# Altium PCB AltiumSTM32_PCB.PcbDoc
Units mm, origin at the board's own origin, x right, y up, seen from the top; angles counter-clockwise.
Board outline 40.03 x 35.76 mm, 4 copper layers (Top Layer, Int1 (GND), Int2 (PWR), Bottom Layer), stack 1.57 mm thick; 35 components, 27 nets, 170 pads, 54 vias.
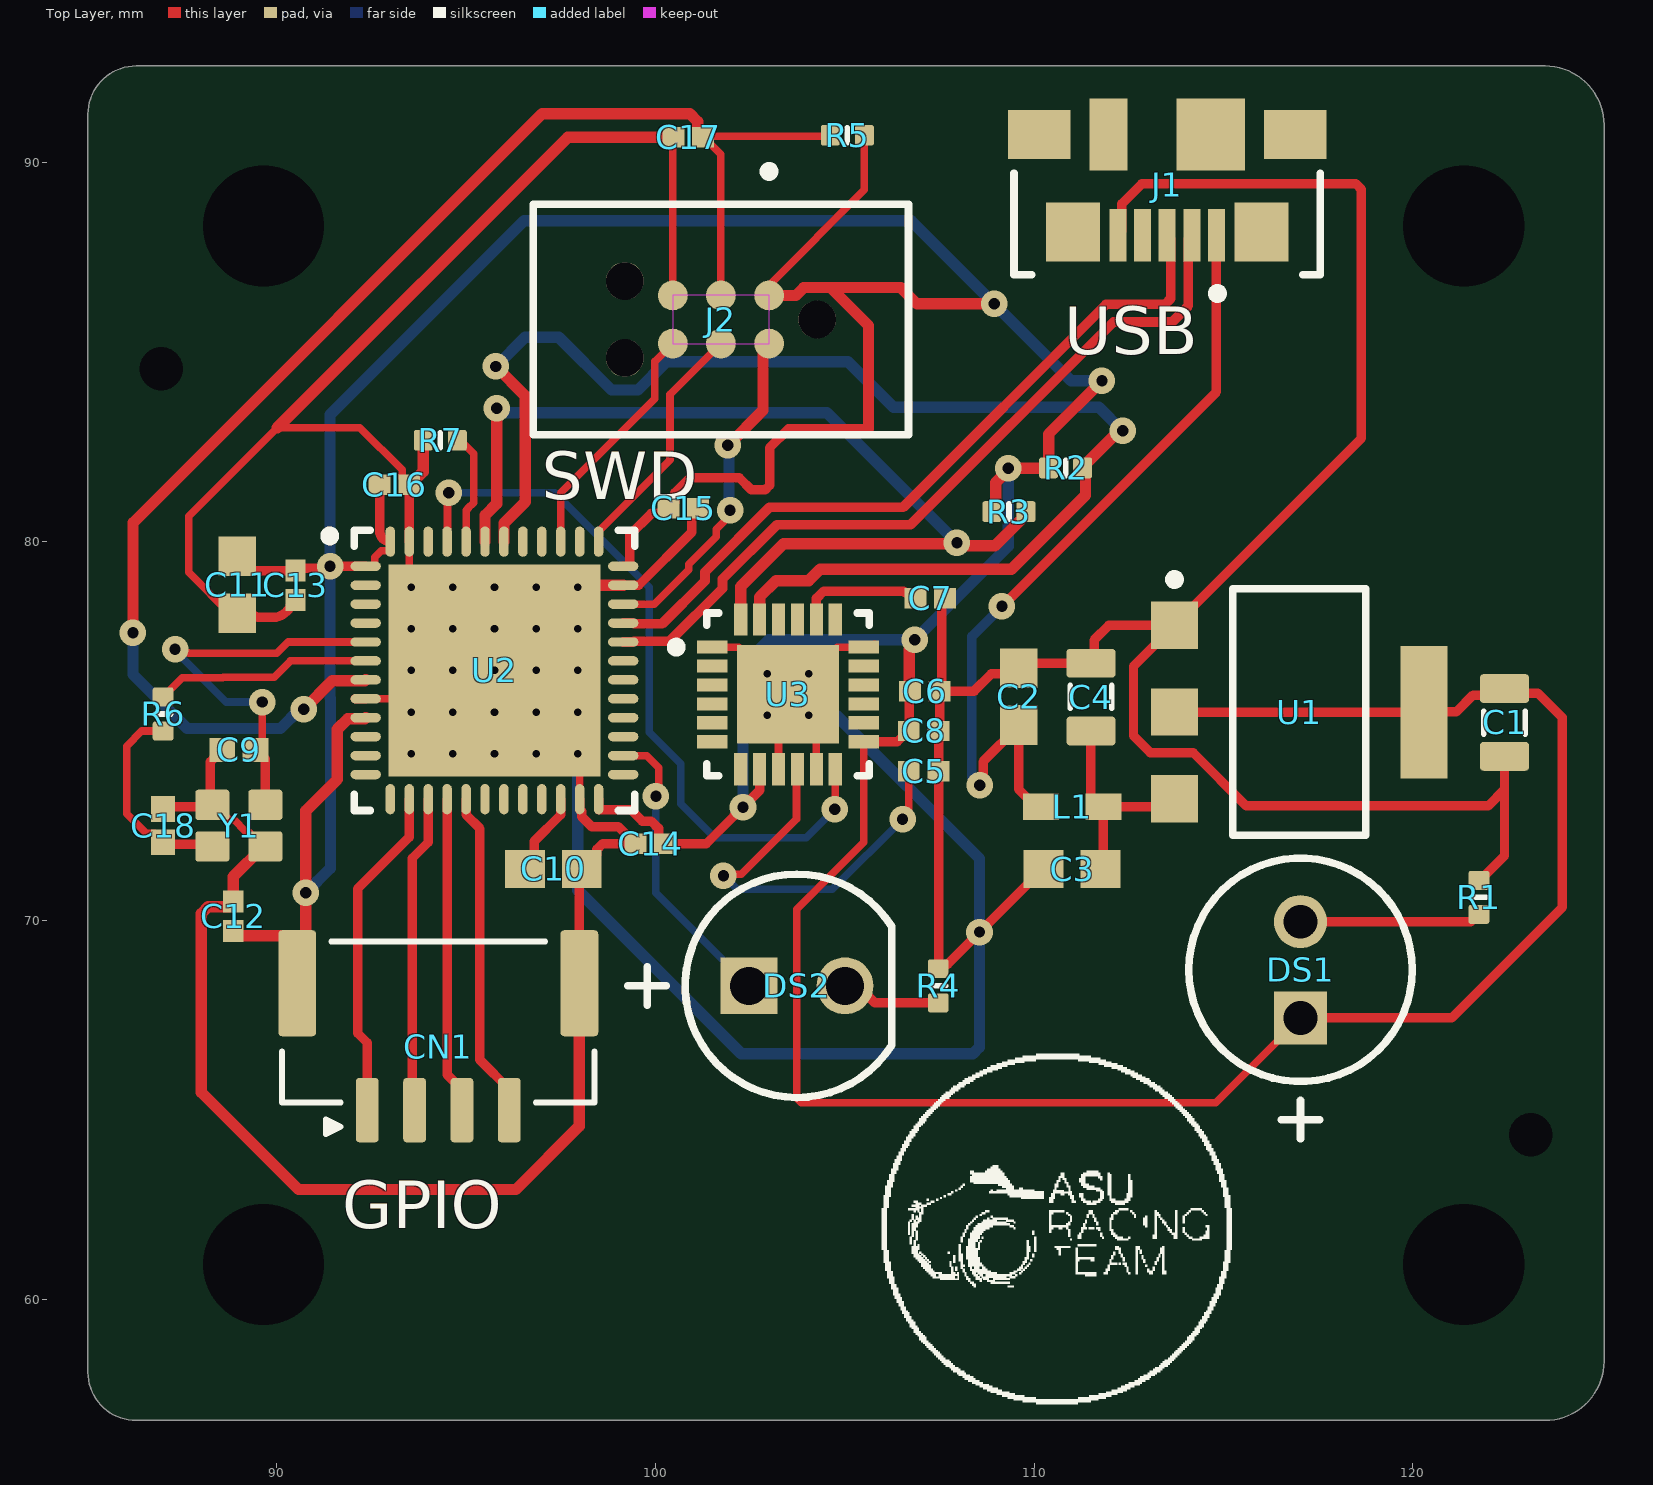
[diagram p0: Top Layer view]
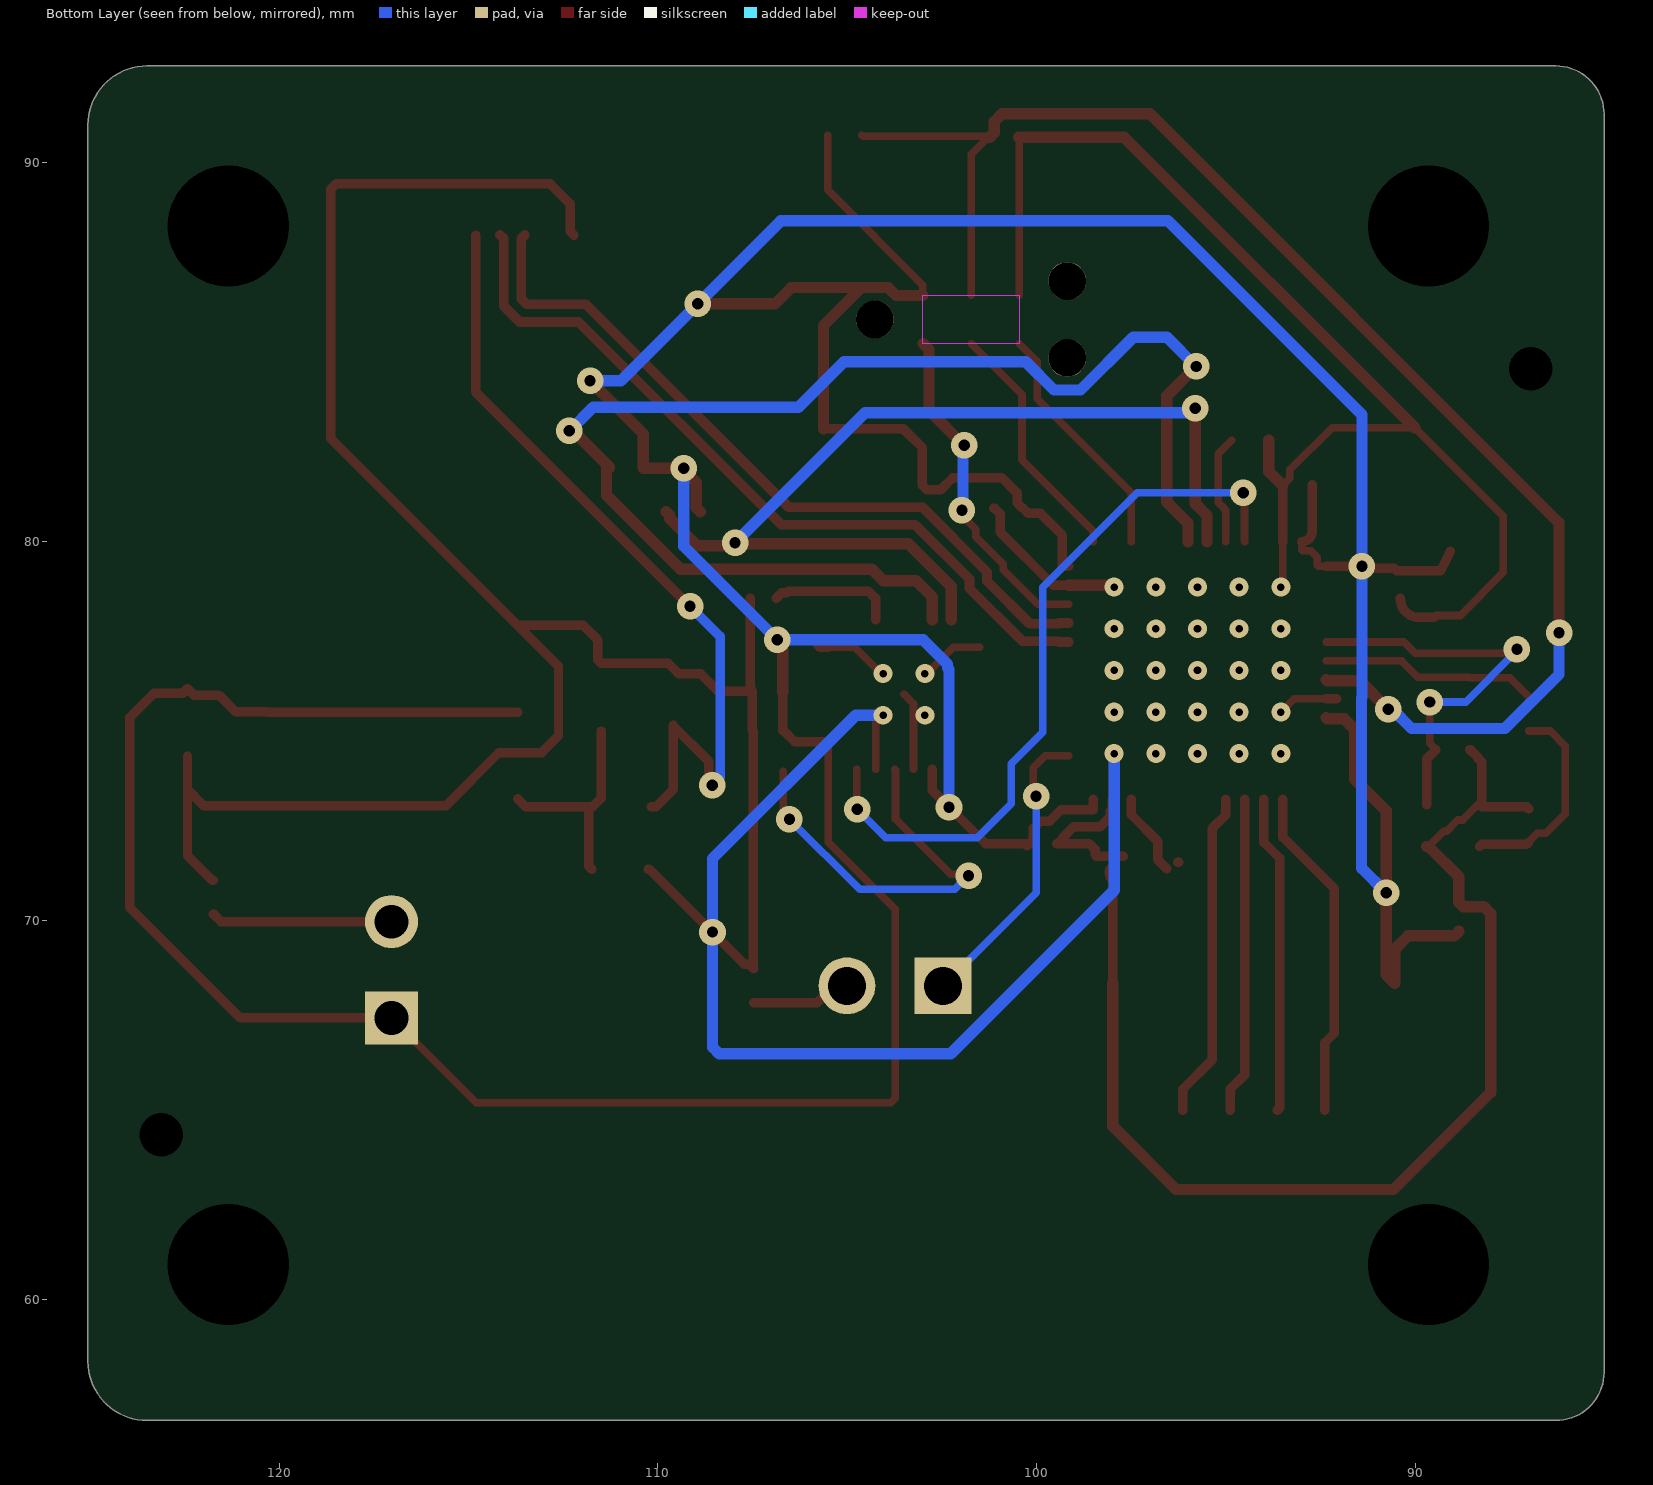
[diagram p1: Bottom Layer view, seen from below]
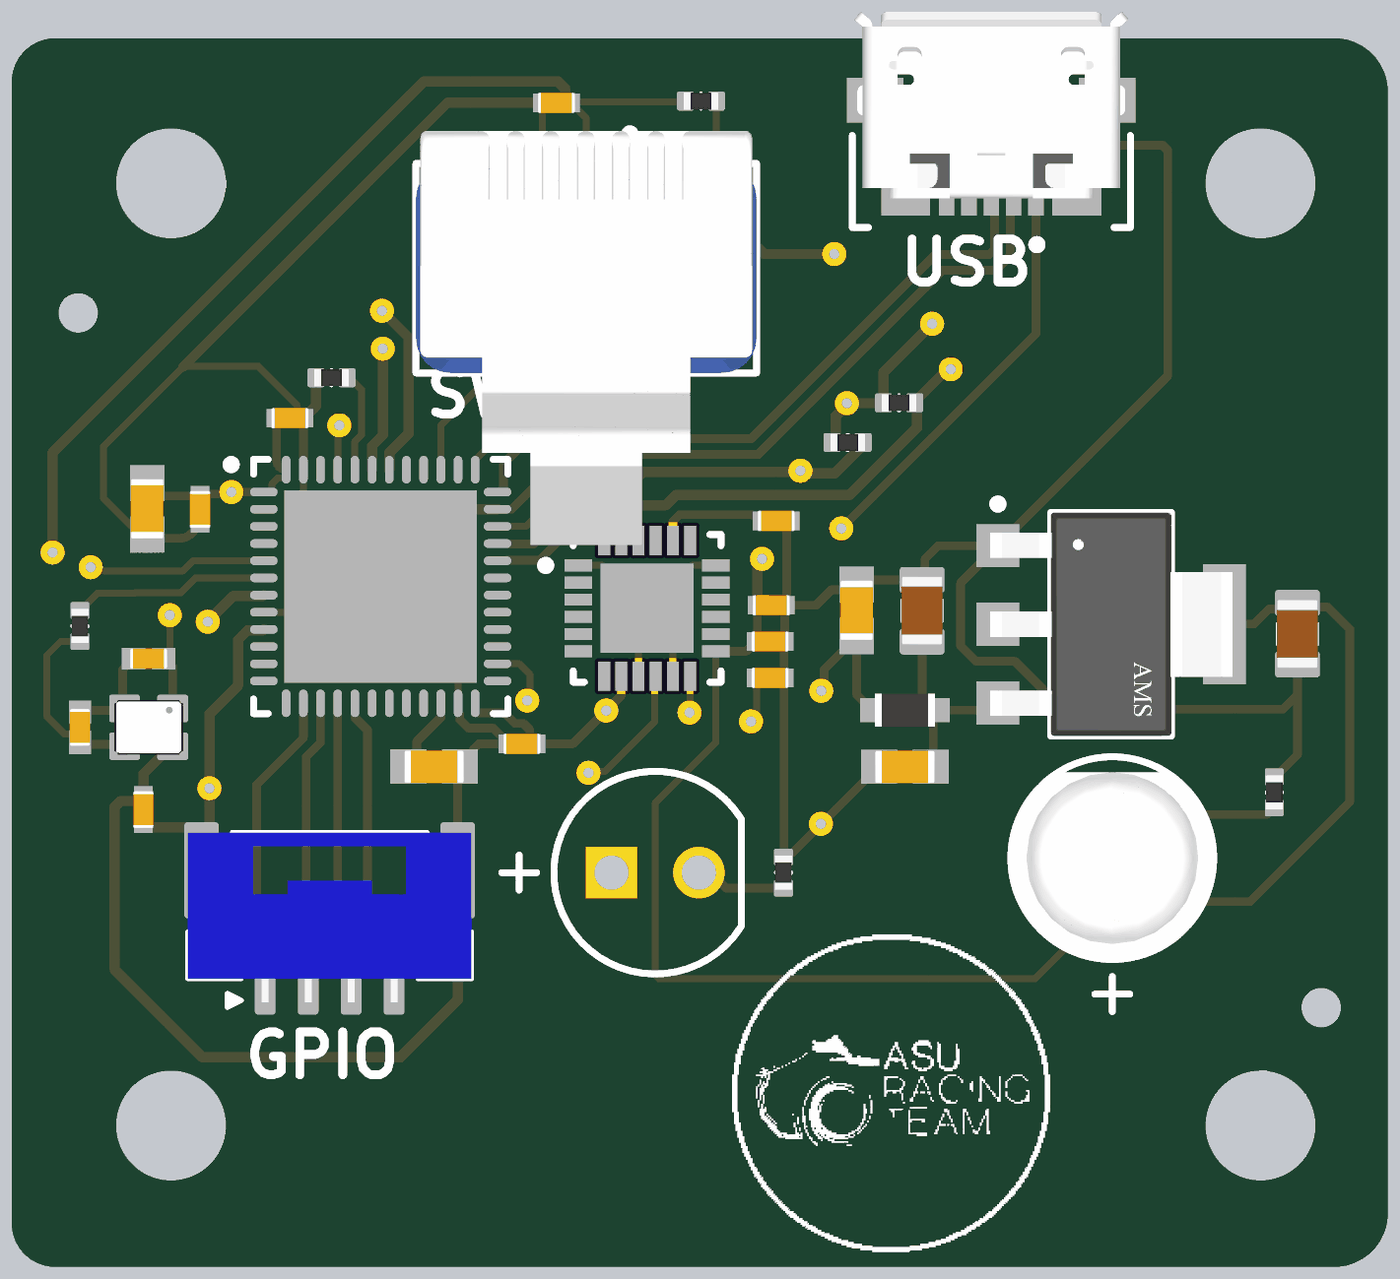
[diagram p2: 3D render of the assembled board from above, using the file's embedded part models]

## Layer stack, top to bottom
Top Solder: solder mask 0.0254, SM-001, Dk 4
Top Layer: signal copper 0.035
Dielectric 1: prepreg 0.2, PP-017, Dk 4.6
Int1 (GND): signal copper 0.0175
Dielectric 3: core 1.065, Core-039, Dk 4.6
Int2 (PWR): signal copper 0.0175
Dielectric 5: prepreg 0.2, PP-017, Dk 4.6
Bottom Layer: signal copper 0.035
Bottom Solder: solder mask 0.0254, SM-001, Dk 4

## Board outline
85.017,58.065 85.017,91.289 cw(c86.287,91.289) 86.287,92.559 123.49,92.559 cw(c123.49,91.002) 125.047,91.002 125.047,58.353 cw(c123.49,58.353) 123.49,56.795 86.287,56.795 cw(c86.287,58.065)

## Design rules (kind name [scope] priority, off if disabled: settings)
Clearance [All] p1: gap=0.2 ignorepadtopadclearanceinfootprint=FALSE
DiffPairsRouting [All] p1: maxlimit=0.254 minlimit=0.203 mostfreqgap=0.254 toplayer_maxgap=0.203 toplayer_prefgap=0.203 toplayer_minwidth=0.26 toplayer_maxwidth=0.26 toplayer_prefwidth=0.26 bottomlayer_maxgap=0.203 bottomlayer_prefgap=0.203 bottomlayer_minwidth=0.26 bottomlayer_maxwidth=0.26 bottomlayer_prefwidth=0.26 impedanceprofiledriven=TRUE impedanceprofileid={25930445-925E-4212-9ADA-EDD0736B0B84} impedanceprofilevalue=90.000000 maxuncoupledlength=12.7
PolygonConnect [All] p1: connectstyle=Direct reliefconductorwidth=0.254 reliefentries=4 polygonreliefangle="90 Angle" airgapwidth=0.254
RoutingVias [All] p1: holewidth=0.3 width=0.7 viastyle="Through Hole" minholewidth=0.25 minwidth=0.55 maxholewidth=0.4 maxwidth=0.9
SolderMaskExpansion [All] p1: expansion=0 istentingtop=FALSE
SupplyNets "Schematic Supply Nets_4" [InNet('+5V')] p1: voltage=0.000
SupplyNets "Schematic Supply Nets_3" [InNet('3V3')] p2: voltage=0.000
SupplyNets "Schematic Supply Nets_2" [InNet('VBUS')] p3: voltage=0.000
SupplyNets "Schematic Supply Nets_1" [InNet('GND')] p4: voltage=0.000
UnRoutedNet [All] p1: checkbadconnections=TRUE
Width [All] p1: maxlimit=1 minlimit=0.2 preferedwidth=0.3 midlayer1_minwidth=0.254 midlayer1_maxwidth=0.254 midlayer1_prefwidth=0.254 midlayer2_minwidth=0.254 midlayer2_maxwidth=0.254 midlayer2_prefwidth=0.254 minimp=50.000000 maximp=50.000000 favimp=50.000000
28 further rules are at their usual default settings.

## Classes and differential pairs
differential pair USB_D: +USB_D_P -USB_D_N

## Components (designator, comment, footprint, x,y, rotation, side; value= is the part's Value field where it differs from the comment)
C1 "Capacitor 22µF +/-40% 16V 0805" CAPC0805(2012)145_L 122.42,75.22 r270 top value=22u
C2 "Capacitor 1 uF +/- 10% 16 V 0603" CAPC1608X94X35NL15T15 109.594,75.908 r90 top value=2u2
C3 "Capacitor 1 uF +/- 10% 16 V 0603" CAPC1608X94X35NL15T15 111,71.352 r180 top value=2u2
C4 "Capacitor 22µF +/-40% 16V 0805" CAPC0805(2012)145_L 111.5,75.9 r90 top value=22u
C5 "Capacitor 0.1 uF +/- 5% 16 V 0402" CAPC1005X56X25LL10T15 107.079,73.941 r0 top value=100n
C6 "Capacitor 0.1 uF +/- 5% 16 V 0402" CAPC1005X56X25LL10T15 107.112,76.054 r0 top value=10n
C7 "Capacitor 0.1 uF +/- 5% 16 V 0402" CAPC1005X56X25LL10T15 107.26,78.508 r0 top value=2n2
C8 "Capacitor 0.1 uF +/- 5% 16 V 0402" CAPC1005X56X25LL10T15 107.079,75 r0 top value=100n
C9 "Capacitor 6.8 nF +/- 10% 16 V 0402" CAPC1005X56X25NL10T15 89,74.5 r0 top value=10p
C10 "Capacitor 1 uF +/- 10% 16 V 0603" CAPC1608X94X35NL15T15 97.307,71.357 r0 top value=2u2
C11 "Capacitor 1 uF +/- 10% 16 V 0603" CAPC1608X94X35NL15T15 88.958,78.862 r270 top value=2u2
C12 "Capacitor 0.1 uF +/- 5% 16 V 0402" CAPC1005X56X25LL10T15 88.85,70.107 r270 top value=100n
C13 "Capacitor 0.1 uF +/- 5% 16 V 0402" CAPC1005X56X25LL10T15 90.496,78.845 r90 top value=100n
C14 "Capacitor 0.1 uF +/- 5% 16 V 0402" CAPC1005X56X25LL10T15 99.861,72.021 r0 top value=100n
C15 "Capacitor 0.1 uF +/- 5% 16 V 0402" CAPC1005X56X25LL10T15 100.74,80.882 r180 top value=100n
C16 "Capacitor 0.1 uF +/- 5% 16 V 0402" CAPC1005X56X25LL10T15 93.11,81.5 r180 top value=100n
C17 "Capacitor 0.1 uF +/- 5% 16 V 0402" CAPC1005X56X25LL10T15 100.864,90.679 r0 top value=100n
C18 "Capacitor 6.8 nF +/- 10% 16 V 0402" CAPC1005X56X25NL10T15 87,72.5 r270 top value=10p
CN1 "BM04B-GHS-TBT" JST-BM04B-GHS-TBT_V 94.266,66.664 r0 top
DS1 "WP7113SGD" KING-WP7113SGD_V 117.033,68.694 r90 top
DS2 "UR502DC" CGX-UR502DC 103.737,68.271 r0 top
J1 "473460001" FP-473460001-MFG 113.514,90.402 r180 top
J2 "TC2030-MCP-NL" FP-TC2030-MCP-NL-MFG 101.73,85.865 r180 top
L1 "120R" MURA-BLM18-F-H1-CHIP-2_V 111,73 r0 top
R1 "Resistor 9K1  +/-5 % 0402 63 mW" RESC0402(1005)_L 121.745,70.607 r90 top value=1k
R2 "Resistor 9K1  +/-5 % 0402 63 mW" RESC0402(1005)_L 110.832,81.947 r0 top value=2k2
R3 "Resistor 9K1  +/-5 % 0402 63 mW" RESC0402(1005)_L 109.334,80.793 r0 top value=2k2
R4 "Resistor 9K1  +/-5 % 0402 63 mW" RESC0402(1005)_L 107.467,68.271 r90 top value=1k
R5 "Resistor 9K1  +/-5 % 0402 63 mW" RESC0402(1005)_L 105.068,90.729 r180 top value=10k
R6 "43D2KR2F" RESC0402(1005)_L 87,75.45 r90 top value=0R
R7 "Resistor 9K1  +/-5 % 0402 63 mW" RESC0402(1005)_L 94.32,82.676 r180 top value=10k
U1 "AMS1117-3.3" FP-AMS1117-IPC_C 117,75.5 r0 top
U2 "STM32F411CEU6" STM-UFQFPN48_L 95.75,76.6 r0 top
U3 "MPU-6050" IS-QFN-24_V 103.5,75.965 r0 top
Y1 "24MHz" EPSON-FA-128_V 89,72.5 r270 top

## Footprints (in the part's own frame and the unit in brackets; to place one, negate y for a bottom-side part, rotate by r counter-clockwise, add the part's x,y. Pads: shape width x height; smd on the part's side, far side on the other; paste and mask are expansions set on the pad)
CAPC0805(2012)145_L [mm] "Chip Capacitor, Body 2.0x1.2mm, Height 1.45mm, IPC High Density"
  rrect25% 0.76x1.3 smd: 1(-0.9,0) 2(0.89,0)
  silkscreen extent -0.3,-0.55 0.3,0.55, body extent -1,-0.6 1,0.6, height 1.45
CAPC1005X56X25LL10T15 [mm] "Chip Capacitor, 2-Leads, Body 1.10x0.60mm, IPC High Density"
  rect 0.58x0.54 smd: 1(-0.39,0) 2(0.39,0)
  body extent -0.55,-0.3 0.55,0.3, height 0.56
CAPC1005X56X25NL10T15 [mm] "Chip Capacitor, 2-Leads, Body 1.10x0.60mm, IPC Medium Density"
  rect 0.68x0.64 smd: 1(-0.44,0) 2(0.44,0)
  body extent -0.55,-0.3 0.55,0.3, height 0.56
CAPC1608X94X35NL15T15 [mm] "Chip Capacitor, 2-Leads, Body 1.75x0.96mm, IPC Medium Density"
  rect 1.05x1 smd: 1(-0.75,0) 2(0.75,0)
  body extent -0.87,-0.48 0.87,0.48, height 0.94
CGX-UR502DC [mm] "THD, 2-Leads, Dia 5.9mm, Pin Spacing 2.54mm"
  rect 1.5x1.5 hole 1: 1(-1.27,0)
  round 1.5 hole 1: 2(1.27,0)
  silkscreen extent -4.47,-2.95 2.5,2.95, body extent -2.95,-2.95 2.5,2.95, height 9.1
EPSON-FA-128_V [mm] "SMD, 4-Leads, Body 2x1.6mm, Pitch 1.45mm"
  rrect20% 0.8x0.9 smd: 1(-0.55,0.7) 2(-0.55,-0.7) 3(0.55,-0.7) 4(0.55,0.7)
  body extent -0.8,-1 0.8,1, height 0.4
FP-473460001-MFG [mm]
  rect 0.45x1.38 smd paste+0 mask+0: 1(-1.3,2.31) 2(-0.65,2.31) 3(0,2.31) 4(0.65,2.31) 5(1.3,2.31)
  rect 1.425x1.55 smd paste+0 mask+0: 6(-2.488,2.225) 7(2.488,2.225)
  rect 1.65x1.3 smd paste+0 mask+0: 8(-3.375,-0.35) 11(3.375,-0.35)
  rect 1.8x1.9 smd paste+0 mask+0: 9(-1.15,-0.35)
  rect 1x1.9 smd paste+0 mask+0: 10(1.55,-0.35)
  silkscreen extent -4.05,0.67 4.05,3.97, body extent -4.3,-2.48 4.3,3.45, height 0.25
FP-AMS1117-IPC_C [mm]
  rect 1.25x1.25 smd paste+0 mask+0: 1(-3.295,2.29) 2(-3.295,0) 3(-3.295,-2.29)
  rect 1.25x3.5 smd paste+0 mask+0: 4(3.295,0)
  silkscreen extent -3.42,-3.25 1.75,3.62, body extent -3.9,-3.35 3.9,3.35, height 0.25
FP-TC2030-MCP-NL-MFG [mil]
  round 30.98 smd paste-39370.1 mask+0: 1(-50,-25) 2(-50,25) 3(0,-25) 4(0,25) 5(50,-25) 6(50,25)
  round 39.02 hole 39.02 unplated paste-99999 mask+0: ""(-100,0) ""(100,-40) ""(100,40)
  Keep-Out Layer region: -50.01,-25 49.99,-25 49.99,25 -50.01,25
  silkscreen extent -195,-159 195,120, body extent -199,-124 199,124, height 10
IS-QFN-24_V [mm] "QFN, 24-Leads, Body 4x4mm, Pitch 0.5mm, Thermal Pad 2.7x2.6mm"
  rect 0.8x0.35 smd: 1(-2,1.25) 2(-2,0.75) 3(-2,0.25) 4(-2,-0.25) 5(-2,-0.75) 6(-2,-1.25) 13(2,-1.25) 14(2,-0.75) 15(2,-0.25) 16(2,0.25) 17(2,0.75) 18(2,1.25)
  rect 0.35x0.85 smd mask+0.102: 7(-1.25,-1.975) 8(-0.75,-1.975) 9(-0.25,-1.975) 10(0.25,-1.975) 11(0.75,-1.975) 12(1.25,-1.975) 19(1.25,1.975) 20(0.75,1.975) 21(0.25,1.975) 22(-0.25,1.975) 23(-0.75,1.975) 24(-1.25,1.975)
  rect 2.7x2.6 smd: 25(0,0)
  silkscreen extent -3.07,-2.15 2.15,2.15, body extent -2,-2 2,2, height 0.95
JST-BM04B-GHS-TBT_V [mm] "Connector, 4-Leads, Body 8.25x4.25mm, Pitch 1.25mm"
  rrect30% 0.6x1.7 smd: 1(-1.875,-1.675) 2(-0.625,-1.675) 3(0.625,-1.675) 4(1.875,-1.675)
  rrect20% 1x2.8 smd: MP1(-3.725,1.675) MP2(3.725,1.675)
  silkscreen extent -4.13,-2.31 4.13,2.78, body extent -4.13,-2.18 4.12,2.77, height 4.21
KING-WP7113SGD_V [mm] "THD, 2-Leads, Dia 5.9mm, Body Length 8.6mm"
  rect 1.4x1.4 hole 0.889: 1(-1.27,0)
  round 1.4 hole 0.889: 2(1.27,0)
  silkscreen extent -4.47,-2.95 2.95,2.95, body extent -2.95,-2.95 2.5,2.95, height 15.5
MURA-BLM18-F-H1-CHIP-2_V [mm] "Chip Ferrite Bead, 2-Leads, Body 1.6x0.8mm, Height 0.95mm, Flow"
  rect 0.95x0.7 smd: 1(-0.825,0) 2(0.825,0)
  body extent -0.87,-0.48 0.87,0.48, height 0.95
RESC0402(1005)_L [mm] "Chip Resistor, Body 1.0x0.5mm, IPC High Density"
  rrect25% 0.5x0.55 smd: 1(-0.45,0) 2(0.45,0)
  silkscreen extent 0,-0.2 0,0.2, body extent -0.5,-0.25 0.5,0.25, height 0.3
STM-UFQFPN48_L [mm] "QFN, 48-Leads, Body 7.1x7.1mm, Pitch 0.5mm, Thermal Pad 5.6x5.6mm, IPC High Density"
  oval 0.8x0.25 smd: 1(-3.4,2.75) 2(-3.4,2.25) 3(-3.4,1.75) 4(-3.4,1.25) 5(-3.4,0.75) 6(-3.4,0.25) 7(-3.4,-0.25) 8(-3.4,-0.75) 9(-3.4,-1.25) 10(-3.4,-1.75) 11(-3.4,-2.25) 12(-3.4,-2.75) 25(3.4,-2.75) 26(3.4,-2.25) 27(3.4,-1.75) 28(3.4,-1.25) 29(3.4,-0.75) 30(3.4,-0.25) 31(3.4,0.25) 32(3.4,0.75) 33(3.4,1.25) 34(3.4,1.75) 35(3.4,2.25) 36(3.4,2.75)
  oval 0.25x0.8 smd: 13(-2.75,-3.4) 14(-2.25,-3.4) 15(-1.75,-3.4) 16(-1.25,-3.4) 17(-0.75,-3.4) 18(-0.25,-3.4) 19(0.25,-3.4) 20(0.75,-3.4) 21(1.25,-3.4) 22(1.75,-3.4) 23(2.25,-3.4) 24(2.75,-3.4) 37(2.75,3.4) 38(2.25,3.4) 39(1.75,3.4) 40(1.25,3.4) 41(0.75,3.4) 42(0.25,3.4) 43(-0.25,3.4) 44(-0.75,3.4) 45(-1.25,3.4) 46(-1.75,3.4) 47(-2.25,3.4) 48(-2.75,3.4)
  rect 5.6x5.6 smd: 49(0,0)
  silkscreen extent -4.47,-3.7 3.7,3.7, body extent -3.55,-3.55 3.55,3.55, height 0.6

## Part data
C1 C4: library part CMP-001-00081-4, "Chip Capacitor, 22µF +/-40%, 16V, 0805, Thickness 1.45 mm", Case/Package=0805, Max Operating Temperature=85°C, Min Operating Temperature=-55°C, Tolerance=5%, Voltage Rating=16V, Mounting Technology=SMT, Pins=2
C2 C3 C10 C11: library part CMP-001-00003-6, "Chip Capacitor, 1 uF, +/- 10%, 16 V, 0603 (1608 Metric)", Capacitor Type=Ceramic, Case/Package=0603, Max Operating Temperature=125°C, Min Operating Temperature=-55°C, Tolerance=10%, Voltage Rating=16V, Mounting Technology=SM, Pins=2, RoHS Compliant=True
C5 C6 C7 C8 C12 C13 C14 C15 C16 C17: library part CMP-001-00001-6, "Chip Capacitor, 0.1 uF, +/- 5%, 16 V, 0402 (1005 Metric)", Capacitor Type=Ceramic, Case/Package=0402, Max Operating Temperature=125°C, Min Operating Temperature=-55°C, Tolerance=5%, Voltage Rating=16V, Mounting Technology=SM, Pins=2, RoHS Compliant=True
C9 C18: library part CMP-001-00000-6, "Chip Capacitor, 6.8 nF, +/- 10%, 16 V, 0402 (1005 Metric)", Capacitor Type=Ceramic, Case/Package=0402, Max Operating Temperature=125°C, Min Operating Temperature=-55°C, Tolerance=10%, Voltage Rating=16V, Mounting Technology=SM, Pins=2, RoHS Compliant=True
CN1: library part CMP-002-00053-3, "Header, Pitch 1.25 mm, 1 x 4 Position, Height 4.05 mm, -25 to 85 degC", Pins=6
DS1: library part CMP-007-00010-2, "LED Green, 62.5 mW, 25 mA, -40 to 85 degC, 2-Pin THD, RoHS, Bulk", Case/Package=Radial, Colour=Green, Forward Voltage=2.2V, Manufacturer=Kingbright, Package Description="2-Pin Through Hole Device, Dia 5.9 mm, Body Length 8.6 mm", Package Quantity=1000, Power=62.5mW, Datasheet URL=http://www.kingbrightusa.com/images/catalog/SPEC/WP7113SGD.pdf, Datasheet Version="Rev. 6B, 01/2015", Illumination Colour=Green, Lens Style=Dome, Luminous Intensity=40mcd, Mounting Technology=TH, Nominal Vf=2.2V, Package Reference=WP7113SGD, Packaging=Bulk, RoHS Compliant=True, Viewing Angle=30degrees
DS2: library part CMP-007-00009-2, "Red LED, 80 mW, 30 mA, -25 to 85 degC, 2-Pin THD", Manufacturer="Shenzhen CGX", Package Description="2-Pin Through Hole Device, Dia 5.9 mm, Height 9.1 mm", Power=80mW, Case/Package=UR502DC, Datasheet URL=http://datasheet.octopart.com/UR502DC-Chengguangxing-datasheet-62330342.pdf, Datasheet Version=Sep-14, Manufacturer URL=http://szcgx.com/, Mounting Technology=TH, Package Reference=UR502DC, RoHS Compliant=Unknown
J1: library part CMP-2000-05246-2, "CONN RCPT USB2.0 MICRO B SMD R/A", Current Rating=1.8A, Manufacturer=Molex, Package=0, Temperature="-30°C to +85°C", Temperature Range High=+85°C, Temperature Range Low=-30°C, Voltage Rating=30V, Automotive=No, Category=Conn, ComponentLink2Description=Datasheet, ComponentLink2URL=https://www.molex.com/webdocs/datasheets/pdf/en-us/0473460001_IO_CONNECTORS.pdf, Conn Orientation="Right Angle", Contact Material=Gold,Nickel, Device Class L1=Connectors, Device Class L2="USB Connectors", Device Class L3=unset, Digikey Description="CONN RCPT USB2.0 MICRO B SMD R/A", Footprint Url=https://www.molex.com/pdm_docs/sd/473460001_sd.pdf, Height=2.945mm, Is Female=yes, Lead Free=Yes, Manufacturer Part Number=473460001, Number Of Contacts=5, Octopart=https://octopart.com/47346-0001-molex-7164928, Pitch=0.65mm, RoHS=TRUE, Shielding=true, Usb Standard="USB 2.0"
J2: library part CMP-205963-000002-1, "CABLE TAG-CONNECT IN-CIRCUIT", Package Quantity=1, Lead Free="Lead Free", Reach SVHC Compliant=Yes, RoHS Compliant=Yes, Series=-
L1: library part CMP-006-00004-3, "Chip Ferrite Bead for General Use, 120 Ohm, 500 mA, -55 to 125 degC, 0603 (1608 Metric), RoHS, Tape and Reel", Case/Package=0603, Current Rating=500mA, Manufacturer=Murata, Max Operating Temperature=125°C, Min Operating Temperature=-55°C, Package Quantity=4000, Package Reference=BLM18_H950-2, Resistance=200mohm, Tolerance=25%, Core Material=Ferrite, Datasheet URL=https://statics3.seeedstudio.com/images/opl/datasheet/303010016.pdf, Datasheet Version=Jun-12, Impedance=120Ohm, Max Current Rating=500mA, Packaging=TapeandReel, RoHS Compliant=True
R1 R2 R3 R4 R5 R7: library part CMP-009-00135-3, "Chip Resistor, 9,1 kOhms, +/-5 %, 63 mW, -55 to 155 degC, 0402", Case/Package=0402, Max Operating Temperature=155°C, Min Operating Temperature=-55°C, Power=63mW, Tolerance=5%, Pins=2
R6: library part CMP-009-00100-2, "43K2 0.063W 1% 0402 (1005 Metric)  SMD", Case/Package=0402, Power=63mW, Tolerance=1%, Mounting Technology=SMT, Pins=2
U1: library part CMP-209535-000001-1, "LDO Voltage Regulators 1A, 3.3V", Dropout Voltage=1.1V, Manufacturer="Advanced Monolithic Systems", Max Junction Temp=+125°C, Max Power Dissipation=1.2W, Max Supply Voltage=15V, Nominal Supply Current=5mA, Output Current=1A, Output Voltage=3.3V, Package=AMS1117, Temperature="-40°C to +125°C", Temperature Range Low=-40°C, Automotive=No, Category=IC, ComponentLink2Description=Datasheet, ComponentLink2URL=http://www.advanced-monolithic.com/pdf/ds1117.pdf, Device Class L1="Integrated Circuits (ICs)", Device Class L2="Power Management ICs", Device Class L3="Voltage Regulators - Linear", Height=1.8mm, Ipc Land Pattern Name=SOT229P700X180-4, Lead Free=Yes, Manufacturer Part Number=AMS1117-3.3, Number Of Outputs=1, Octopart=https://octopart.com/ams1117-3.3-advanced+monolithic+systems-25899300, Output Type=Fixed, RoHS=TRUE, Standoff Height=0.64mm, Temperature Range High=+125°C
U2: library part CMP-0243-00165-1, "ARM Cortex-M4 32-bit MCU+FPU, 512 KB Flash, 128 KB RAM, 36 I/Os, 48-Pin UFQFPN, -40 to 85 degC, Tray", I/Os (High Current)=36, Operating Frequency(F) (Processor speed) (MHz)=100, Package Description=UFQFPN48, Package Reference="48-Pin Ultra Thin Fine Pitch Quad Flat No-Lead, 7 x 7 x 0.6 mm Body, 0.5 mm Pitch, Exposed Pad", Supply Voltage(Vcc) min (V)=1.7, ComponentLink1Description="Manufacturer URL", ComponentLink1URL=http://www.st.com/, ComponentLink2Description=Datasheet, ComponentLink2URL=http://www.st.com/st-web-ui/static/active/en/resource/technical/document/datasheet/DM00115249.pdf, Core="ARM Cortex-M4", DatasheetVersion="Rev. 6", FLASH Size (Prog) (kB)=512, Internal RAM Size (kB)=128, Mounting Technology="Surface Mount", Packing=Tray
U3: library part CMP-1753-00002-2, "3-Axis Gyroscope, Accelerometer and a Digital Motion Processor(TM) (DMP), 2.375 to 3.46 V, -40 to 85 degC, 24-Pin QFN, RoHS, Tape and Reel", Manufacturer=InvenSense, Standard Package=5,000, Category=Sensors,Transducers, Datasheet URL=http://datasheet.octopart.com/MPU-6050-InvenSense-datasheet-14421344.pdf, Datasheet Version="Rev. 3.3, 05/2012", Dynamic Catalog=MPU-6000™Series, Family=Multifunction, Featured Product=MPU-60506-Axis,IntegratedI²CSolution, Manufacturer URL=http://www.invensense.com/, Online Catalog=MPU-6000™Series, Other Names="1428-1007-2 / MPU6050", Output Type=Digital, Sensor Type=MotionTracking, Unit PriceUSD=Digital
Y1: library part CMP-003-00028-1, "Crystal, 24 MHz, +/- 10 ppm, -20 to 75 degC, 4-Pin SMD, RoHS, Tape and Reel", Case/Package=SMD/SMT, Load Capacitance=12pF, Max Operating Temperature=75°C, Min Operating Temperature=-20°C, ESR=80, Frequency=24MHz, Mounting Technology=SMT, Pins=4, RoHS Compliant=Yes

## Free pads (board coordinates)
  round 1.524 hole 3.2 unplated: 4(89.651,88.336) 5(89.651,60.909) 6(121.344,60.909) 8(121.344,88.336)
  oval 0x1.524 hole 1.15 unplated: TH(86.95,84.564) TH(123.112,64.341)

## Via types
v1: diameter 0.5, hole 0.2, Top Layer to Bottom Layer, 29 vias
v2: diameter 0.7, hole 0.3, Top Layer to Bottom Layer, 25 vias

## Nets (pads, with @x,y where several pads share a name; then routed paths per layer and width w, separated by ;. In a path a pad name is that pad's centre, name@x,y a point inside that pad or via, vN(x,y) a via of type N, cw(c..) or ccw(c..) an arc to the next point about the centre after c; other vN are vias at no path point)
3V3: C1.1 C6.1 C8.1 C11.1 C12.2 C13.2 C14.2 C15.2 C16.2 CN1.MP1 DS1.1 J2.1 R2.1 R3.1 R5.1 U1.2 U1.4 U2.1 U2.9 U2.24 U2.36 U2.48 U3.8 U3.13 | length 157.3
  Top Layer w0.2: U2.1 92.565,79.35 92.588,79.373 92.588,79.588 92.762,79.762 92.977,79.762 93,79.785 U2.48 ; J2.1 103,86.771 105.518,89.289 R5.1 ; U3.13 105.5,72.059 103.737,70.296 103.737,65.299 103.854,65.182 114.791,65.182 DS1.1
  Top Layer w0.25: C11.1@89.078,79.746 89.107,79.686 89.333,79.235 C13.2 90.554,79.292 91.35,79.292 v2(91.407,79.35) U2.1 ; C16.2 92.72,80.28 ccw(c93,80.28) U2.48 ; U2.24 98.5,72.925 99.347,72.925 99.656,72.616 99.895,72.616 100.085,72.426 100.085,72.132 C14.2@100.251,71.967 ; U2.36 99.318,79.35 99.318,80.168 99.896,80.746 100.214,80.746 C15.2 100.37,80.882 100.515,81.027 100.515,81.286 100.915,81.686 102.213,81.686 102.534,81.364 102.894,81.364 103.019,81.489 103.019,82.481 103.513,82.975 105.627,82.975 ; C14.2 101.341,72.021 102.75,73.43 U3.8 ; U3.13 106.384,74.715 106.669,75 C8.1 106.705,75.016 C6.1@106.705,76.038 ; U1.2 U1.4 120.302,75.507 121.149,75.507 121.588,75.947 122.247,75.947 C1.1 122.538,76.002 123.298,76.002 123.945,75.356 123.945,70.341 121.028,67.424 DS1.1
  Top Layer w0.3: C12.2 88.85,69.709 88.97,69.589 90.191,69.589 90.541,69.239 CN1.MP1 90.767,68.566 v2(90.767,70.728) 90.767,72.89 91.6,73.723 91.6,75.047 91.878,75.325 92.05,75.325 92.325,75.325 U2.9 ; J2.1 103.709,86.5 103.92,86.71 104.62,86.71 ; 105.627,82.975 105.627,85.704 104.62,86.71 ; C6.1@106.705,76.038 106.705,77.158 106.844,77.296 v2(106.844,77.405) ; R3.1 108.984,80.893 108.984,81.56 109.314,81.89 v2(109.314,81.936) R2.1@110.37,81.936 ; v2(108.946,86.278) 106.907,86.278 106.475,86.71 104.62,86.71 ; R2.1 110.382,82.839 v2(111.791,84.248)
  Bottom Layer w0.3: v2(90.767,70.728) 91.418,71.379 91.418,75.865 91.407,75.876 v2(91.407,79.35) 91.407,83.348 96.533,88.474 106.75,88.474 v2(108.946,86.278) 110.976,84.248 v2(111.791,84.248) ; v2(102.312,72.989) 102.312,76.627 102.35,76.665 102.35,76.763 102.991,77.405 v2(106.844,77.405) 109.314,79.874 v2(109.314,81.936)
+5V: C3.1 C4.1 L1.2 U1.3 | length 5.8
  Top Layer w0.25: C4.1 111.5,73.225 111.725,73 L1.2 ; C3.1 111.825,71.427 L1.2 ; U1.3 113.495,73 L1.2
GND: C1.2 C2.2 C3.2 C4.2 C5.2 C6.2 C7.2 C8.2 C9.1 C10.2 C11.2 C12.1 C13.1 C14.1 C15.1 C16.1 C17.1 C18.1 CN1.MP2 J1.5 J2.5 R1.2 R4.2 R7.2 U1.1 U2.8 U2.23 U2.35 U2.47 U2.49 U3.1 U3.9 U3.11 U3.18 U3.25 Y1.2 Y1.4 | length 170.6
  Top Layer w0.2: Y1.2 88.35,73.05 88.75,72.65 88.873,72.65 89.173,72.35 89.25,72.35 Y1.4@89.65,71.95 ; 89.5,78 89.452,78.048 88.817,78.048 87.679,79.186 87.679,80.671 90.016,83.007 92.197,83.007 93.31,81.894 93.31,81.67 93.48,81.5 C16.1 ; U2.8 93.2,75.85 v1(93.55,75.5) ; U2.47 93.5,78.85 v1(93.55,78.8) ; v1(97.95,74.4) 98,74.35 U2.23 ; J2.5 100.46,90.665 C17.1 ; U3.1 102.2,77.215 102.9,76.515 v1(102.95,76.515) ; U3.9 103.25,75.715 U3.25 ; v1(104.05,75.415) 104.25,75.215 U3.11 ; U3.25@104.075,76.49 104.8,77.215 U3.18
  Top Layer w0.25: C18.1 87.055,72.995 88.245,72.995 88.245,74.185 88.345,74.285 88.345,74.305 88.54,74.5 C9.1 ; 89.5,78 89.901,78 ccw(c89.901,78.5) 90.355,78.29 90.396,78.477 C13.1@90.401,78.5 ; U2.8@92.075,75.85 U2.8 ; U2.47 C16.1 ; C10.2@97.706,71.697 98.421,71.697 98.457,71.732 98.457,71.875 98.603,72.021 C14.1@99.451,72.021 ; CN1.MP2 97.991,70.982 97.991,71.062 ccw(c97.829,71.253) C10.2 98.032,71.357 C10.2@98.044,71.37 ; U2.23 98,72.925 98.05,72.875 98.05,72.739 98.314,72.475 99.016,72.475 99.305,72.186 99.305,72.166 C14.1@99.451,72.021 ; U2.35 99.561,78.85 100.965,80.254 100.965,80.737 101.11,80.882 C15.1 ; C14.1 C14.1@99.451,72.021 ; U3.18 105.725,77.215 U3.18@105.775,77.265 ; R4.2 R4.2@107.483,68.737 ; C5.2@107.483,73.927 R4.2@107.483,68.737 ; C5.2@107.485,73.957 107.485,74.998 107.502,75.015 C6.2@107.502,76.036 ; C7.2@107.56,78.508 107.56,76.112 C6.2 108.414,76.054 108.866,76.506 109.442,76.506 C2.2 109.725,76.788 C4.2@111.498,76.788 ; C3.2 110.225,71.352 107.719,68.846 107.592,68.846 R4.2@107.483,68.737 ; C4.2 111.584,76.874 111.584,77.399 111.976,77.79 U1.1 ; J1.5 112.314,88.192 112.314,88.916 112.846,89.448 118.496,89.448 118.643,89.302 118.643,82.728 U1.1 ; R1.2 121.77,71.057 122.42,71.707 122.42,73.451 ; C1.2 122.42,73.451 ; U1.1 112.623,76.708 112.623,74.873 113.071,74.424 114.201,74.424 115.597,73.028 121.996,73.028 122.42,73.451
  Top Layer w0.3: Y1.4 89.65,71.95 88.85,71.15 C12.1 88.85,70.477 88.73,70.357 88.186,70.357 88.011,70.181 88.011,65.454 90.574,62.891 96.316,62.891 97.991,64.566 CN1.MP2 ; 90.016,83.007 97.687,90.679 C17.1 ; C16.1 93.52,81.5 93.87,81.85 R7.2 ; v1(97.95,78.8) 98,78.85 U2.35
  Bottom Layer w0.3: v1(97.95,74.4) 97.95,70.793 102.266,66.477 108.381,66.477 108.557,66.652 v2(108.557,69.692) 108.557,71.63 104.772,75.415 v1(104.05,75.415)
  other v1: 93.55,74.4 94.65,74.4 95.75,74.4 96.85,74.4 102.95,75.415 94.65,75.5 95.75,75.5 96.85,75.5 97.95,75.5 104.05,76.515 93.55,76.6 94.65,76.6 95.75,76.6 96.85,76.6 97.95,76.6 93.55,77.7 94.65,77.7 95.75,77.7 96.85,77.7 97.95,77.7 94.65,78.8 95.75,78.8 96.85,78.8
"IMU CPOUT": C7.1 U3.20 | length 3.3
  Top Layer w0.25: U3.20 104.25,78.499 104.44,78.69 106.558,78.69 106.595,78.653 106.725,78.653 C7.1
"IMU INT": U2.45 U3.12 | length 19.5
  Top Layer w0.2: U2.45 94.51,80.01 94.51,81.254 v2(94.547,81.292) ; v2(104.735,72.93) 104.75,72.945 U3.12
  Bottom Layer w0.2: v2(94.547,81.292) 94.55,81.29 97.337,81.29 99.837,78.79 99.837,74.965 100.663,74.138 100.663,73.075 101.562,72.177 103.981,72.177 v2(104.735,72.93)
"IMU REGOUT": C5.1 U3.10 | length 10.9
  Top Layer w0.2: v2(101.796,71.176) 101.842,71.222 102.27,71.222 103.725,72.677 103.725,73.965 U3.10 ; v2(106.525,72.672) 106.689,72.835 C5.1
  Bottom Layer w0.2: v2(101.796,71.176) 101.804,71.176 102.163,70.817 104.671,70.817 v2(106.525,72.672)
IMU_SCL: R2.2 U2.42 U3.23 | length 36.3
  Top Layer w0.3: v2(95.787,84.626) 96.564,83.849 96.564,81.05 96,80.486 U2.42 ; U3.23 102.75,78.535 103.182,78.967 104.046,78.967 104.348,79.269 109.402,79.269 111.357,81.224 R2.2@111.357,82.025 ; R2.2 111.282,81.972 112.233,82.924 v2(112.335,82.924)
  Bottom Layer w0.3: v2(95.787,84.626) 96.556,85.395 97.448,85.395 98.84,84.003 99.54,84.003 100.287,84.751 105.085,84.751 106.287,83.548 111.71,83.548 v2(112.335,82.924)
IMU_SDA: R3.2 U2.43 U3.24 | length 26.6
  Top Layer w0.3: U2.43 95.5,80.694 95.811,81.004 v2(95.811,83.522) ; U3.24 102.25,78.81 103.383,79.943 107.935,79.943 v2(107.961,79.969) ; v2@107.961,79.943 108.012,79.892 108.966,79.892 109.684,80.61 109.684,80.693 R3.2
  Bottom Layer w0.3: v2(95.811,83.522) 95.926,83.407 104.523,83.407 v2(107.961,79.969)
"LED PWR K": DS1.2 R1.1 | length 4.8
  Top Layer w0.25: DS1.2 121.526,69.964 121.72,70.157 R1.1
"MCU LED A": DS2.1 U2.26 | length 7.9
  Top Layer w0.2: U2.26 99.773,74.35 100.092,74.031 100.092,73.359 v2(100.013,73.281)
  Bottom Layer w0.2: v2(100.013,73.281) 100.013,70.724 DS2.1
"MCU LED K": DS2.2 R4.1 | length 2.6
  Top Layer w0.25: DS2.2 105.345,68.271 105.795,67.821 R4.1
"MCU SWCLK": J2.4 U2.37 | length 6.6
  Top Layer w0.2: U2.37 98.5,80.275 100.385,82.161 100.385,83.885 J2.4
"MCU SWDIO": J2.2 U2.34 | length 9
  Top Layer w0.2: U2.34 99.971,78.35 100.876,79.255 100.876,79.397 101.607,80.128 101.607,80.328 101.97,80.691 v2(101.97,80.826)
  Top Layer w0.3: v2(101.914,82.542) 102.841,83.469 102.841,85.071 J2.2
  Bottom Layer w0.3: v2(101.914,82.542) 101.942,82.514 101.942,80.854 v2(101.97,80.826)
"MCU SWO": J2.6 U2.39 | length 6.5
  Top Layer w0.2: U2.39 97.5,81.284 99.985,83.77 99.985,84.755 J2.6
MCU_BOOT0: R7.1 U2.44 | length 2.9
  Top Layer w0.2: R7.1@94.845,82.676 95.2,82.32 95.2,81.03 95.05,80.88 95.05,80.875 95,80.825 U2.44
MCU_NRST: C17.2 J2.3 R5.2 U2.7 | length 39
  Top Layer w0.2: C17.2 101.279,90.704 104.593,90.704 R5.2 ; C17.2@101.274,90.679 101.73,90.223 J2.3
  Top Layer w0.3: v2(86.205,77.591) 86.205,80.496 97.008,91.299 100.909,91.299 101.114,91.094 101.114,90.799 101.234,90.679 C17.2 ; v2(90.718,75.575) 91.468,76.325 92.325,76.325 U2.7
  Bottom Layer w0.3: v2(86.205,77.591) 86.205,76.496 87.635,75.065 90.1,75.065 90.61,75.575 v2(90.718,75.575)
MCU_OCS_IN: C9.2 U2.5 Y1.1 | length 11
  Top Layer w0.2: v2(87.315,77.162) 87.41,77.066 87.672,77.066 87.682,77.056 90.005,77.056 90.299,77.35 U2.5 ; C9.2 89.614,74.674 v2(89.614,75.765)
  Top Layer w0.25: C9.2@89.46,74.5 89.7,74.26 Y1.1
  Bottom Layer w0.2: v2(87.315,77.162) 87.315,77.118 88.667,75.765 v2(89.614,75.765)
MCU_OCS_OUT: R6.2 U2.6 | length 5.7
  Top Layer w0.2: R6.2 87.506,76.406 88.578,76.406 88.587,76.415 89.93,76.415 90.365,76.85 U2.6
MCU_PA4: CN1.1 U2.14 | length 8.9
  Top Layer w0.25: CN1.1 92.391,66.766 92.14,67.017 92.14,70.837 93.5,72.197 U2.14
MCU_PA5: CN1.2 U2.15 | length 8.4
  Top Layer w0.25: CN1.2 93.579,65.05 93.579,71.64 94,72.061 U2.15
MCU_PA6: CN1.3 U2.16 | length 8.4
  Top Layer w0.25: U2.16 94.5,65.929 94.891,65.539 CN1.3
MCU_PA7: CN1.4 U2.17 | length 8.7
  Top Layer w0.25: U2.17 95,72.789 95.364,72.424 95.364,66.315 96.141,65.539 CN1.4
MCU_VCAP1: C10.1 U2.22 | length 2.3
  Top Layer w0.25: C10.1@96.251,71.536 C10.1@96.276,71.536 ; C10.1 96.797,71.598 96.797,72.086 97.5,72.789 U2.22
USB_D_N: J1.2 U2.32 | length 20.6
  Top Layer w0.26: U2.32 99.415,77.35 99.433,77.368 100.371,77.368 101.77,78.767 101.77,79.009 103.207,80.446 106.735,80.446 112.093,85.803 113.647,85.803 114.07,86.227 114.07,87.999 J1.2
USB_D_P: J1.3 U2.33 | length 19.9
  Top Layer w0.26: U2.33 99.415,77.85 99.433,77.832 100.18,77.832 101.307,78.959 101.307,79.201 103.015,80.909 106.544,80.909 111.901,86.266 113.455,86.266 113.607,86.418 113.607,87.999 J1.3
VBUS: C2.1 J1.1 L1.1 | length 21.8
  Top Layer w0.25: v2(108.567,73.564) 108.654,73.651 108.654,74.192 109.594,75.133 C2.1 109.594,73.456 110.05,73 L1.1 ; v2(109.149,78.29) 114.814,83.954 J1.1
  Bottom Layer w0.25: v2(108.567,73.564) 108.357,73.775 108.357,77.497 v2(109.149,78.29)
"XTAL IN": C18.2 R6.1 Y1.3 | length 5.5
  Top Layer w0.2: C18.2 87,72.08 86.78,72.3 86.556,72.3 86.038,72.817 86.038,74.6 86.438,75 R6.1
  Top Layer w0.25: C18.2 87.055,72.005 88.245,72.005 Y1.3
pads on no net: J1.4 J1.6 J1.7 J1.8 J1.9 J1.10 J1.11 J2. U2.2 U2.3 U2.4 U2.10 U2.11 U2.12 U2.13 U2.18 U2.19 U2.20 U2.21 U2.25 U2.27 U2.28 U2.29 U2.30 U2.31 U2.38 U2.40 U2.41 U2.46 U3.2 U3.3 U3.4 U3.5 U3.6 U3.7 U3.14 U3.15 U3.16 U3.17 U3.19 U3.21 U3.22

## Silkscreen, mask and mechanical layers (free items; w line width, h text height)
Top Overlay:
  drawing of 128 lines, arcs and shapes, not listed
  text "USB" at 110.795,84.954 h1.25
  text "SWD" at 96.993,81.113 h1.25
  text "GPIO" at 91.732,61.875 h1.25

## Text inside footprints (layer, text, board x,y; h text height)
L1: Mechanical 6 "Land Pattern Adapted for Flow Soldering" at 110,73.6 h0.05